# Altium PCB PCB2.PcbDoc
Units mil, origin at the board's own origin, x right, y up, seen from the top; angles counter-clockwise.
Board outline 4212.6 x 2559.06 mil, 2 copper layers (Top Layer, Bottom Layer); 18 components, 22 nets, 80 pads, 0 vias.
Unrouted connection lines stored in the file: 42.
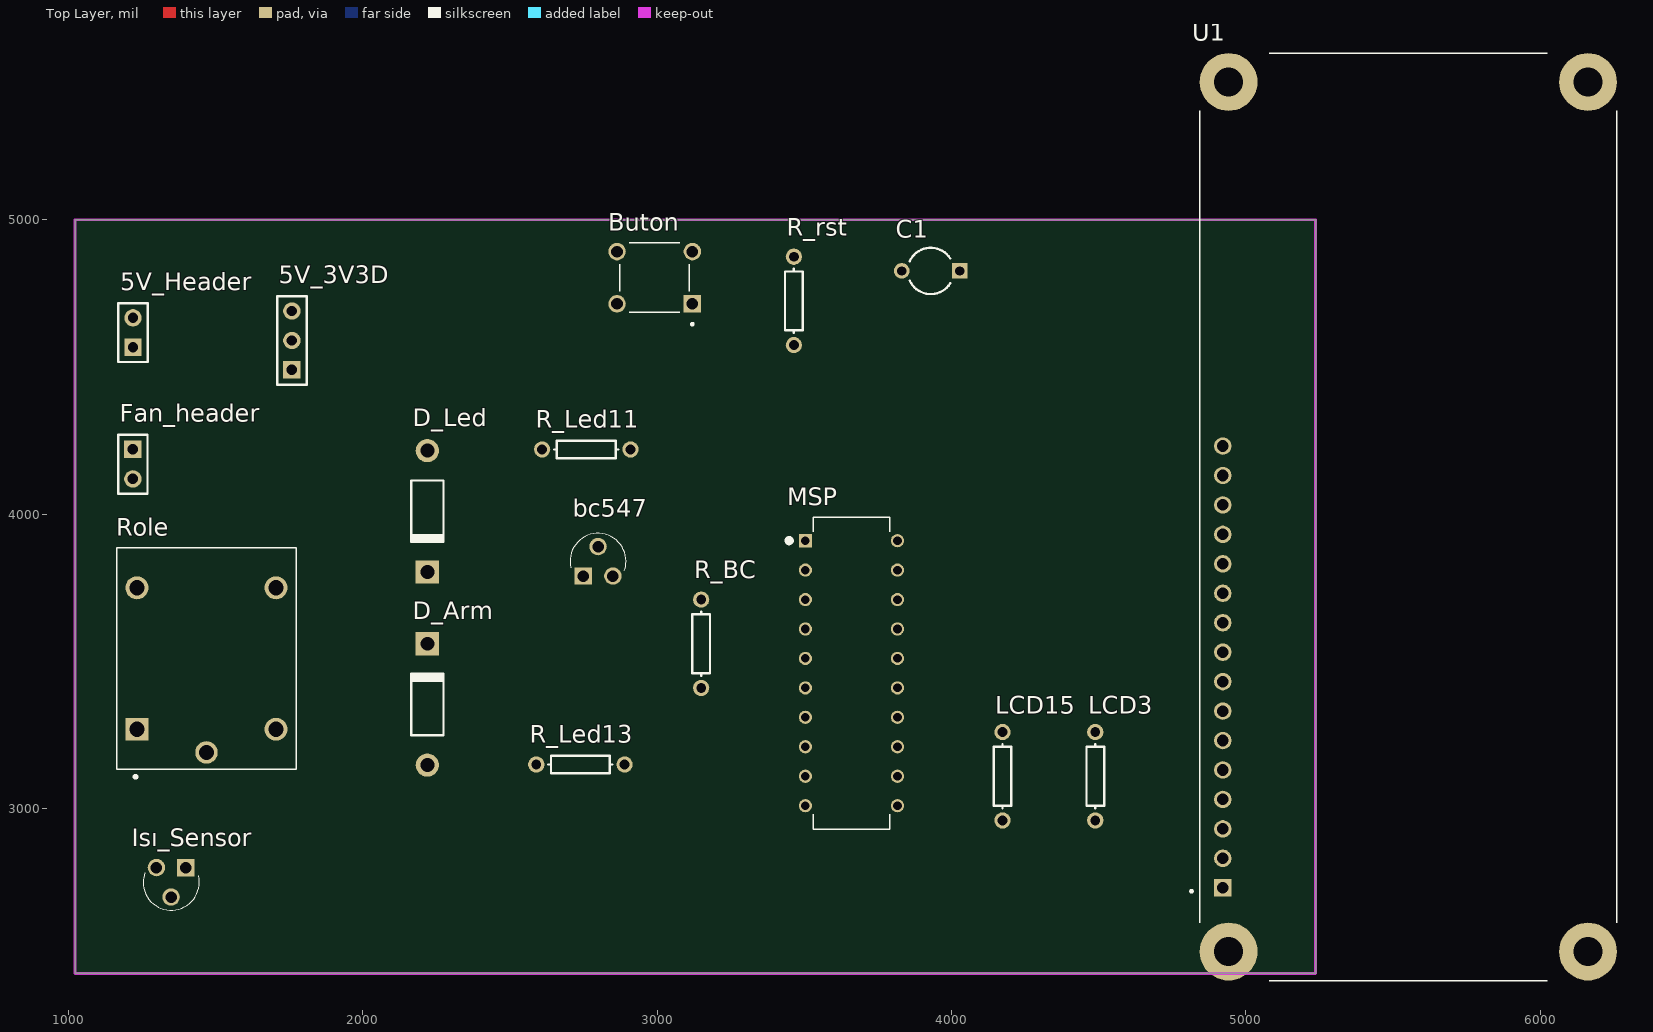
[diagram p0: Top Layer view]
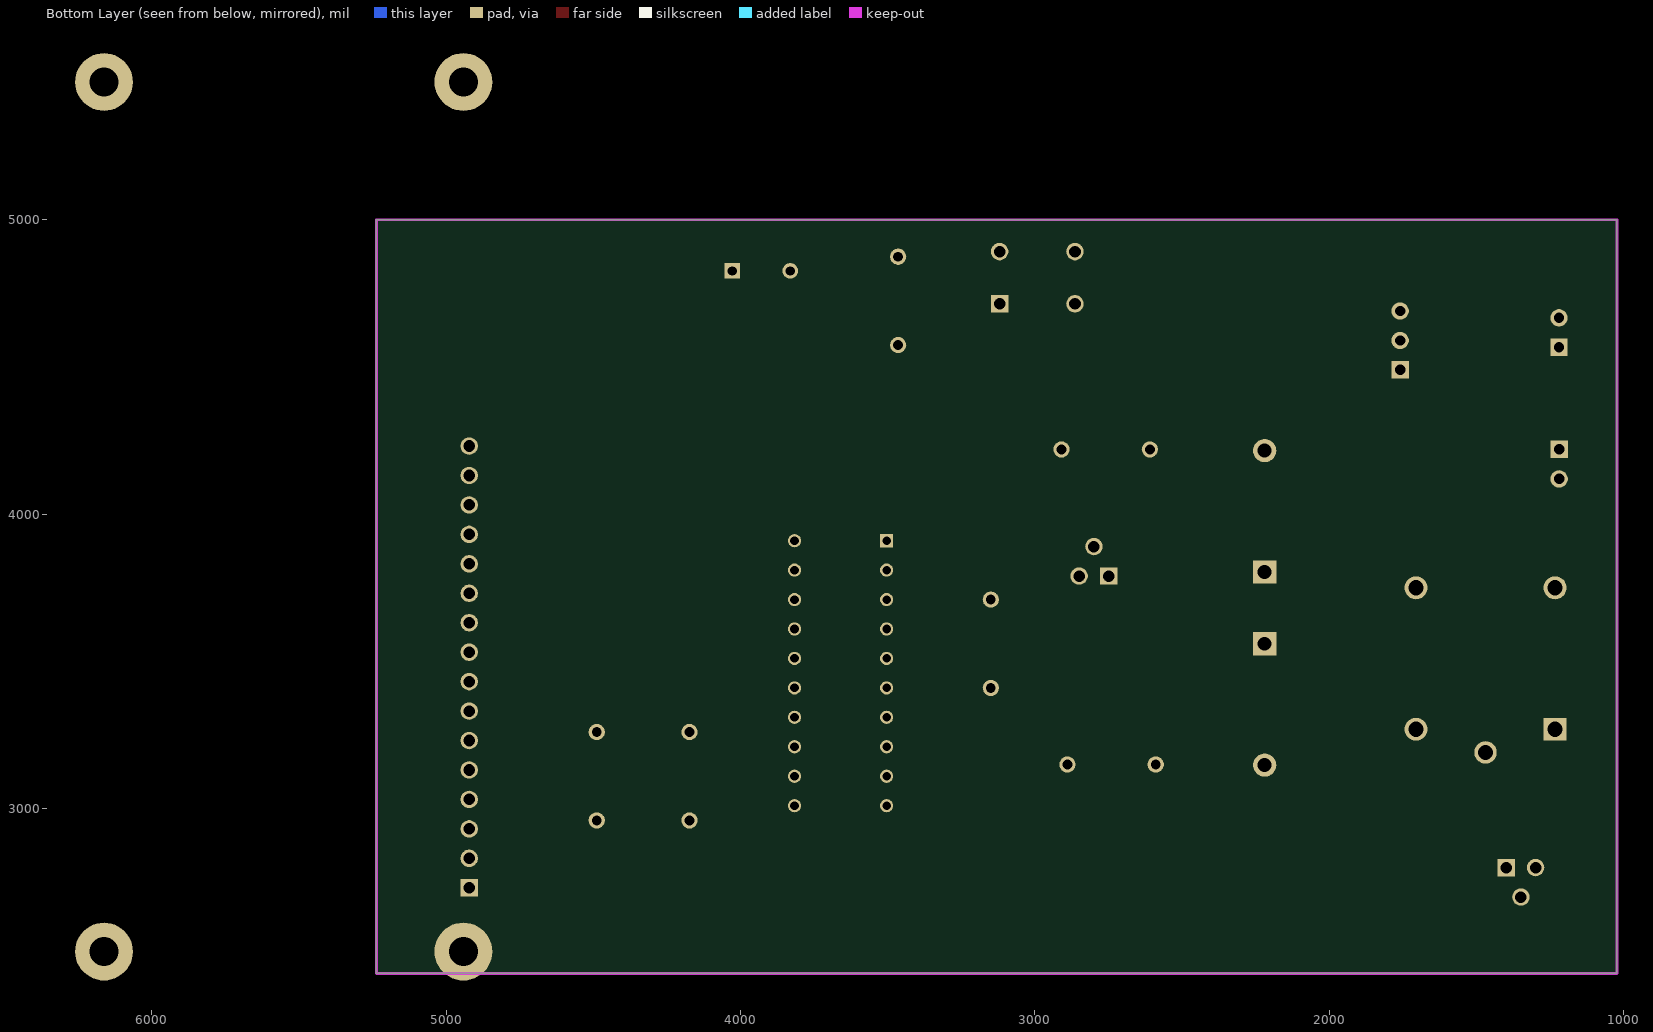
[diagram p1: Bottom Layer view, seen from below]

## Layer stack, top to bottom
Top Solder: solder mask 0.4, Solder Resist, Dk 3.5
Top Layer: signal copper 1.4
Dielectric 1: dielectric 12.6, FR-4, Dk 4.8
Bottom Layer: signal copper 1.4
Bottom Solder: solder mask 0.4, Solder Resist, Dk 3.5

## Board outline
1023.62,2440.94 5236.22,2440.94 5236.22,5000 1023.62,5000

## Design rules (kind name [scope] priority, off if disabled: settings)
Clearance [All] p1: gap=10 ignorepadtopadclearanceinfootprint=FALSE except(0: Arc-Hole Track-Hole SMDPad-Hole THPad-Hole Via-Hole Fill-Hole Poly-Hole Region-Hole Text-Hole)
PolygonConnect [All] p1: connectstyle=Relief reliefconductorwidth=10 reliefentries=4 polygonreliefangle="90 Angle" airgapwidth=10
RoutingVias [All] p1: holewidth=28 width=50 viastyle="Through Hole" minholewidth=28 minwidth=50 maxholewidth=28 maxwidth=50
SolderMaskExpansion [All] p1: expansion=4 istentingtop=FALSE
Width [All] p1: maxlimit=10 minlimit=10 preferedwidth=10
30 further rules are at their usual default settings.

## Components (designator, comment, footprint, x,y, rotation, side; value= is the part's Value field where it differs from the comment)
5V_3V3D "Header 3" HDR1X3 1760,4490 r90 top
5V_Header "Header 2" HDR1X2 1220.47,4566.93 r90 top
bc547 "BC547B" TO127P254X732-3 2850,3890 r0 top
Buton "TS02-66-95-BK-260-LCR-D" SW_TS02-66-95-BK-260-LCR-D 2992.13,4803.15 r180 top
C1 "Cap2" CAPR5-4X5 3929.37,4826.22 r180 top value=100pF
D_Arm "Diode 1N4007" DO-41 2220,3354.09 r90 top
D_Led "Diode 1N4007" DO-41 2220,4010 r270 top
Fan_header "Header 2" HDR1X2 1220,4220 r270 top
Isı_Sensor "MCP9700" TO127P254X732-3 1300,2700 r180 top
LCD3 "" AXIAL-0.3 4488.19,3110.24 r270 top value=2.2
LCD15 "Res1" AXIAL-0.3 4173.23,3110.24 r270 top value=33
MSP "MSP430G2553IN20" DIP794W45P254L2692H508Q20 3660.24,3460.24 r0 top
R_BC "Res1" AXIAL-0.3 3150,3560 r270 top value=4.7K
R_Led11 "Res1" AXIAL-0.3 2760,4220 r180 top value=1K
R_Led13 "Res1" AXIAL-0.3 2740,3150 r180 top value=1K
R_rst "Res1" AXIAL-0.3 3464.57,4724.41 r270 top value=1K
Role "SRD-05VDC-SL-C" RELAY_SRD-05VDC-SL-C 1470,3510 r90 top
U1 "LCD2X16" LCD_LCD2X16 5551.18,3991.34 r90 top

## Footprints (in the part's own frame and the unit in brackets; to place one, negate y for a bottom-side part, rotate by r counter-clockwise, add the part's x,y. Pads: shape width x height; smd on the part's side, far side on the other; paste and mask are expansions set on the pad)
AXIAL-0.3 [mm] "Axial Device, Thru-Hole; 2 Leads; 0.3 in Pin Spacing"
  round 1.4 hole 0.85: 1(-3.81,0) 2(3.81,0)
  silkscreen extent -2.77,-0.76 2.77,0.76
CAPR5-4X5 [mm] "Capacitor; 2 Leads"
  rect 1.35x1.35 hole 0.8: 1(-2.5,0)
  round 1.35 hole 0.8: 2(2.5,0)
  silkscreen extent -1.69,-2 1.82,2
DIP794W45P254L2692H508Q20 [mm]
  rect 1.14x1.14 hole 0.74: 1(-3.97,11.43)
  round 1.14 hole 0.74: 2(-3.97,8.89) 3(-3.97,6.35) 4(-3.97,3.81) 5(-3.97,1.27) 6(-3.97,-1.27) 7(-3.97,-3.81) 8(-3.97,-6.35) 9(-3.97,-8.89) 10(-3.97,-11.43) 11(3.97,-11.43) 12(3.97,-8.89) 13(3.97,-6.35) 14(3.97,-3.81) 15(3.97,-1.27) 16(3.97,1.27) 17(3.97,3.81) 18(3.97,6.35) 19(3.97,8.89) 20(3.97,11.43)
  silkscreen extent -5.57,-13.46 3.3,13.46
DO-41 [mm] "Diode, Axial; Body 5.2 x 2.7 mm (LxDia. max), Lead Dia. 0.86 mm (max)"
  round 2 hole 1.2: 1(-5.23,0)
  rect 2x2 hole 1.2: 2(5.23,0)
  silkscreen extent -2.65,-1.4 2.75,1.4
HDR1X2 [mm] "Connector; Header; 2 Position"
  rect 1.5x1.5 hole 0.9: 1(0,0)
  round 1.5 hole 0.9: 2(2.54,0)
  silkscreen extent -1.27,-1.27 3.81,1.27
HDR1X3 [mm] "Connector; Header; 3 Position"
  rect 1.5x1.5 hole 0.9: 1(0,0)
  round 1.5 hole 0.9: 2(2.54,0) 3(5.08,0)
  silkscreen extent -1.27,-1.27 6.35,1.27
LCD_LCD2X16 [mm]
  rect 1.508x1.508 hole 1: 1(-32,16)
  round 1.508 hole 1: 2(-29.46,16) 3(-26.92,16) 4(-24.38,16) 5(-21.84,16) 6(-19.3,16) 7(-16.76,16) 8(-14.22,16) 9(-11.68,16) 10(-9.14,16) 11(-6.6,16) 12(-4.06,16) 13(-1.52,16) 14(1.02,16) 15(3.56,16) 16(6.1,16)
  round 5 hole 2.5: S1(-37.5,15.5) S2(37.5,15.5) S3(37.5,-15.5) S4(-37.5,-15.5)
  silkscreen extent -40,-18 40,18.8, body extent -40,-18 40,18, height 7
RELAY_SRD-05VDC-SL-C [mm]
  rect 1.98x1.98 hole 1.32: A1(-6.1,6)
  round 1.98 hole 1.32: A2(-6.1,-6) NC(6.1,6) NO(6.1,-6)
  round 1.935 hole 1.29: COM(-8.1,0)
  silkscreen extent -10.3,-7.75 9.55,7.75, body extent -9.6,-7.8 9.6,7.8, height 15.8
SW_TS02-66-95-BK-260-LCR-D [mm]
  rect 1.508x1.508 hole 1: 1(-3.25,2.25)
  round 1.508 hole 1: 2(3.25,2.25) 3(-3.25,-2.25) 4(3.25,-2.25)
  silkscreen extent -3.35,-3 3,4.1, body extent -3.95,-3 3.95,3, height 9.7
TO127P254X732-3 [mil]
  rect 59x59 hole 39: 1(-100,-100)
  round 59 hole 39: 2(-50,0) 3(0,-100)
  silkscreen extent -146,-83 45,45, body extent -93,-71 93,71, height 210

## Part data
5V_3V3D: "Header, 3-Pin", LatestRevisionDate=17-Jul-2002, LatestRevisionNote="Re-released for DXP Platform.", Publisher="Altium Limited"
5V_Header Fan_header: "Header, 2-Pin", LatestRevisionDate=17-Jul-2002, LatestRevisionNote="Re-released for DXP Platform.", Publisher="Altium Limited"
bc547: "NPN Epitaxial Silicon Transistor", Package=None, Availability=Unavailable, MF="{'manufacturer': u'ON Semiconductor'}", MP=BC547B, Price=None
Buton: Package=None, Availability=Unavailable, MF="{'manufacturer': u'CUI Devices'}", MP=TS02-66-95-BK-260-LCR-D, Price=None
C1: "Capacitor", PackageDescription="Capacitor; 2 Leads", PackageReference=CAPR5-4X5, Published=23-Sep-2002, Publisher="Altium Limited"
D_Arm D_Led: "1 Amp General Purpose Rectifier", Code_JEDEC=DO-204-AL, ComponentLink1Description="Manufacturer Link", ComponentLink1URL=http://www.fairchildsemi.com/, ComponentLink2Description=Datasheet, ComponentLink2URL=http://www.fairchildsemi.com/ds/1N%2F1N4001.pdf, DatasheetVersion=1998, LatestRevisionDate=17-Jul-2002, LatestRevisionNote="Re-released for DXP Platform.", PackageDescription="Diode, Axial; Body 5.2 x 2.7 mm (LxDia. max), Lead Dia. 0.86 mm (max)", PackageReference=DO-41, PackageVersion=Aug-1999, Published=8-Jun-2000, Publisher="Altium Limited"
Isı_Sensor: library part BC547B, "NPN Epitaxial Silicon Transistor", Package=None, Availability=Unavailable, MF="{'manufacturer': u'ON Semiconductor'}", MP=BC547B, Price=None
LCD3: library part Res1, "Resistor", LatestRevisionDate=17-Jul-2002, LatestRevisionNote="Re-released for DXP Platform.", PackageDescription="Axial Device, Thru-Hole; 2 Leads; 0.3 in Pin Spacing", PackageReference=AXIAL-0.3, Published=8-Jun-2000, Publisher="Altium Limited"
LCD15 R_BC R_Led11 R_Led13 R_rst: "Resistor", LatestRevisionDate=17-Jul-2002, LatestRevisionNote="Re-released for DXP Platform.", PackageDescription="Axial Device, Thru-Hole; 2 Leads; 0.3 in Pin Spacing", PackageReference=AXIAL-0.3, Published=8-Jun-2000, Publisher="Altium Limited"
MSP: "MSP430G2x53, MSP430G2x13 Mixed Signal Microcontroller 20-PDIP -40 to 85", Package=None, Availability=Unavailable, MF="{'manufacturer': u'Texas Instruments'}", MP=MSP430G2553IN20, Price=None
Role: "5V Trigger Relay Module For Arduino And Raspberry Pi 5V Trigger Relay Module For Arduino And Raspberry Pi", Package=None, Availability=Unavailable, MF="{'manufacturer': u'Songle Relay'}", MP=SRD-05VDC-SL-C, Price=None
U1: "Display; Display: LCD 2x16 characters (blue backlight)", Package=None, Availability=Unavailable, MF="{'manufacturer': u'mikroElektronika'}", MP=LCD2X16, Price=None

## Nets (pads, with @x,y where several pads share a name; then routed paths per layer and width w, separated by ;. In a path a pad name is that pad's centre, name@x,y a point inside that pad or via, vN(x,y) a via of type N, cw(c..) or ccw(c..) an arc to the next point about the centre after c; other vN are vias at no path point)
3V3: 5V_3V3D.2 Isı_Sensor.1 MSP.1 R_rst.2
+5: 5V_3V3D.1 5V_Header.1 Fan_header.1 LCD15.2 Role.A2 U1.2
But1: Buton.1 Buton.2 C1.1
GND: 5V_3V3D.3 5V_Header.2 bc547.3 C1.2 D_Arm.2 D_Led.2 Isı_Sensor.3 LCD3.1 MSP.20 Role.COM U1.1 U1.5 U1.16
Netbc547_1: bc547.1 Role.A1
Netbc547_2: bc547.2 R_BC.1
NetD_Arm_1: D_Arm.1 R_Led13.2
NetD_Led_1: D_Led.1 R_Led11.2
NetFan_header_2: Fan_header.2 Role.NC
NetLCD3_2: LCD3.2 U1.3
NetLCD15_1: LCD15.1 U1.15
P1.0: Isı_Sensor.2 MSP.2
P1.1: MSP.3 R_Led11.1
P1.2: MSP.4 R_BC.2
P1.3: MSP.5 R_Led13.1
P1.4: MSP.6 U1.11
P1.5: MSP.7 U1.12
P1.6: MSP.14 U1.13
P1.7: MSP.15 U1.14
P2.6: MSP.19 U1.6
P2.7: MSP.18 U1.4
RST: Buton.3 Buton.4 MSP.16 R_rst.1
pads on no net: MSP.8 MSP.9 MSP.10 MSP.11 MSP.12 MSP.13 MSP.17 Role.NO U1.7 U1.8 U1.9 U1.10 U1.S1 U1.S2 U1.S3 U1.S4

## Keep-outs
Keep-Out Layer:
  lines w10: 1023.62,2440.94 1023.62,5000 5157.48,5000 5236.22,5000 5236.22,2440.94 1023.62,2440.94